# Altium PCB SD171-6.0PCB4.PcbDoc (part 11 of 11)
Units mil, origin at the board's own origin, x right, y up, seen from the top; angles counter-clockwise.
Board outline 5995 x 3921.26 mil, 6 copper layers (Top Layer, GND, Mid-Layer 1, Mid-Layer 2, VCC, Bottom Layer); 477 components, 539 nets, 2143 pads, 1050 vias.
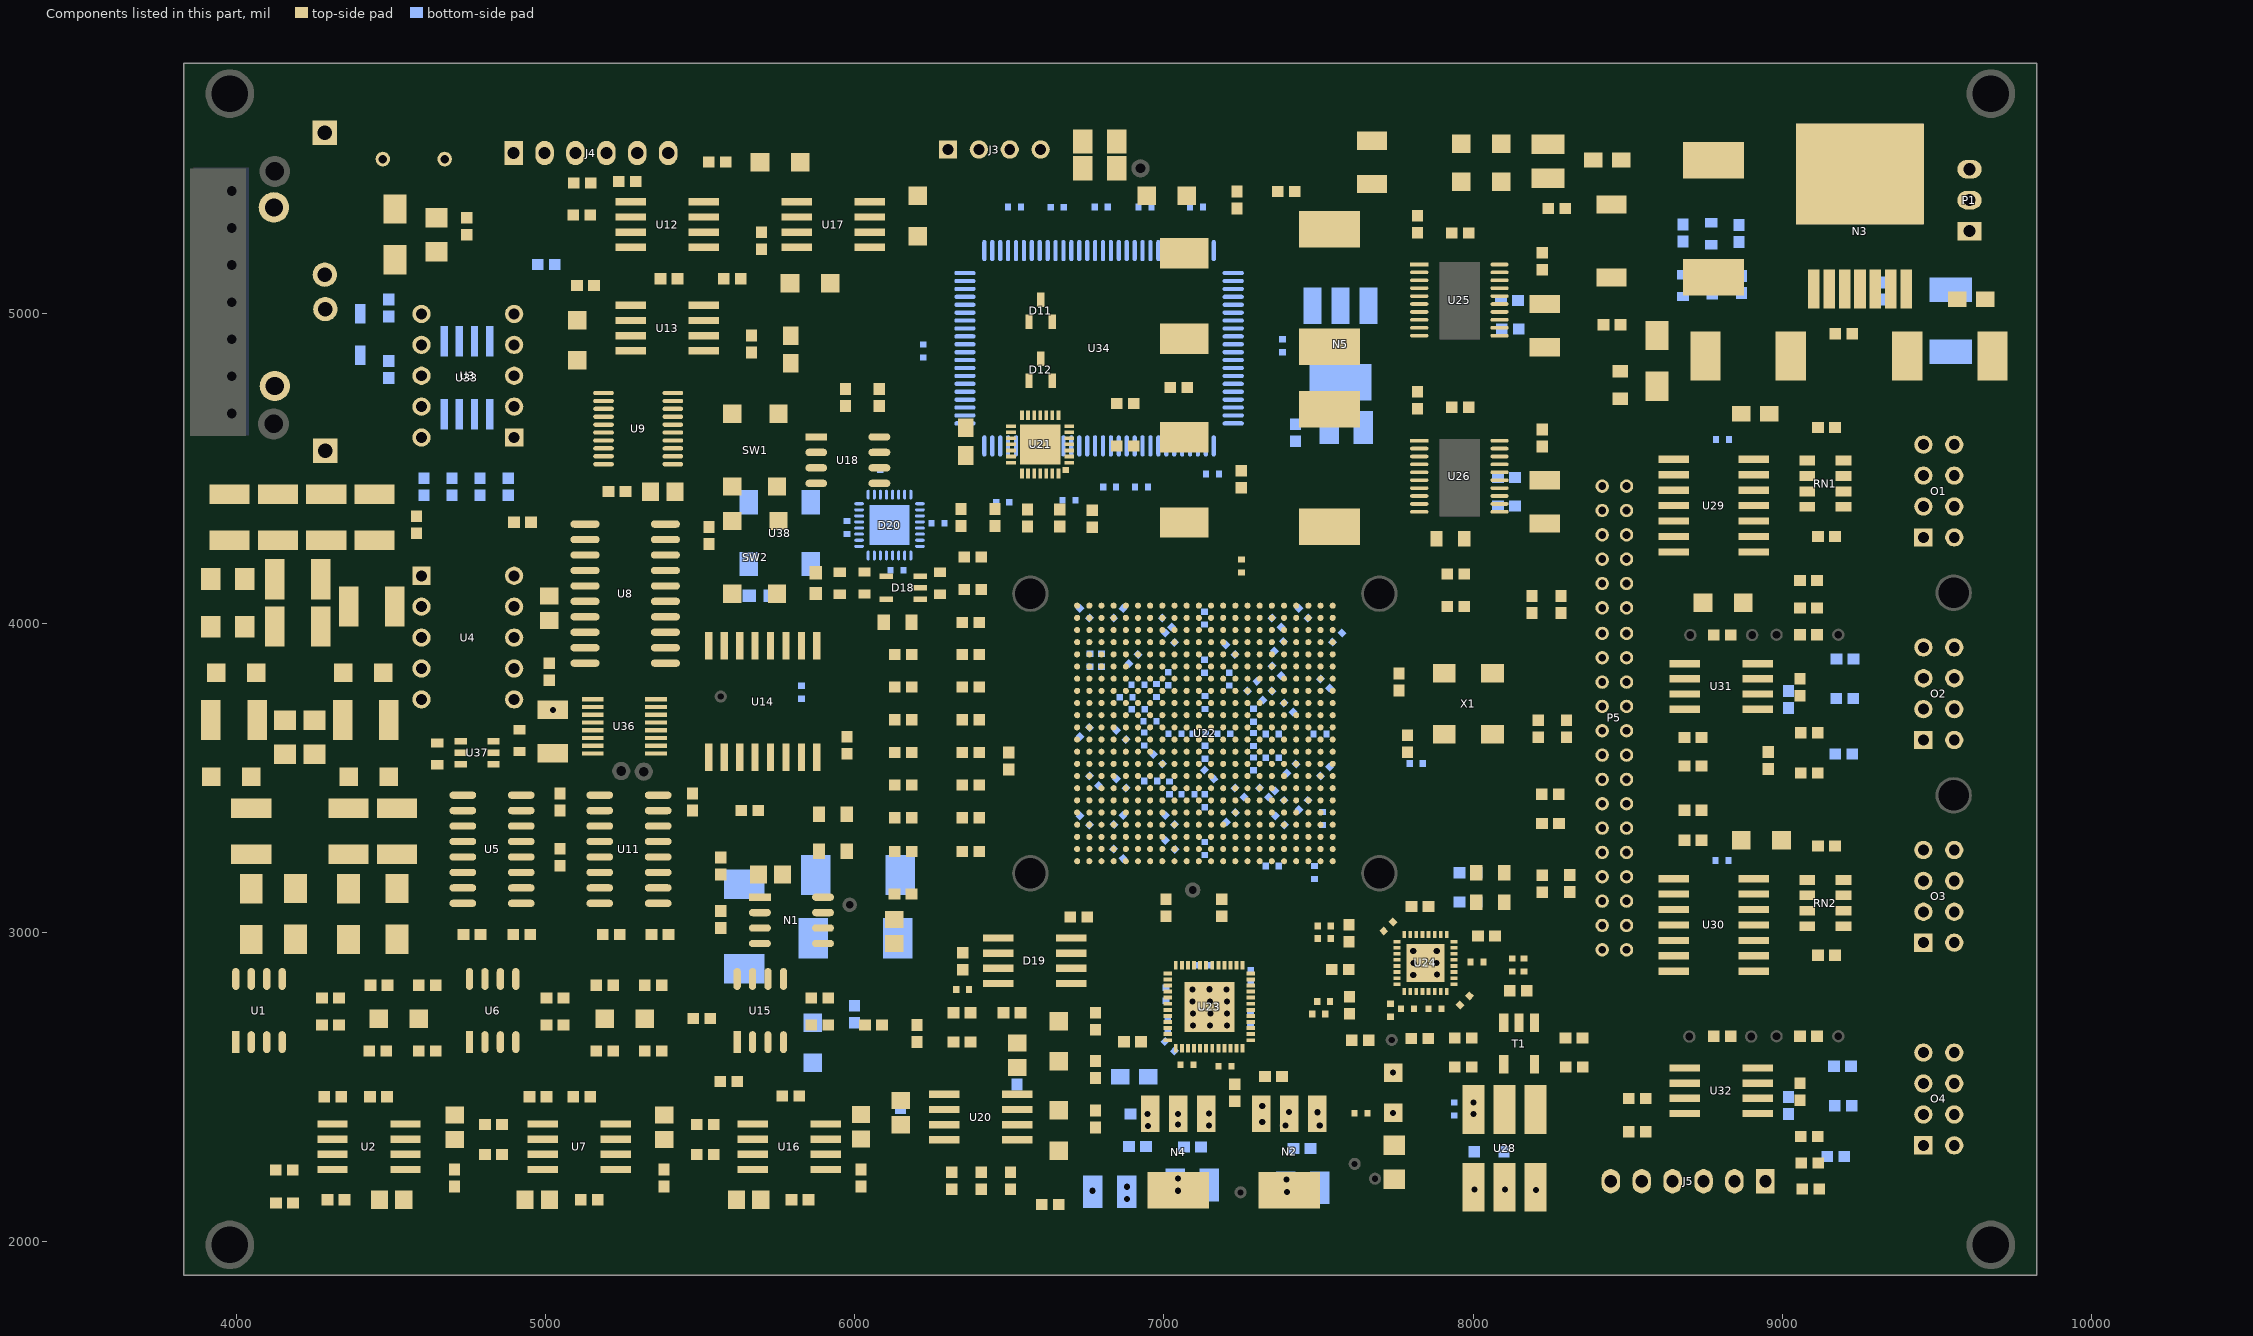
[diagram p15: the components of this part, seen from the top]

## Polygon pours and split planes (outlines as drawn) (continued)
VCC1V2 on VCC (split plane): 7948.44,4686.13 7640.87,4378.56 7417,4378.56 7415.04,4378.31 7413.22,4377.55 7411.65,4376.35 7144.65,4109.35 7143.45,4107.78 7143.14,4107.03 7142.69,4105.96 7142.44,4104 7142.44,3781 7142.69,3779.04 7143.45,3777.22 7144.65,3775.65 7146.22,3774.45 7148.04,3773.69 7150,3773.44 7202,3773.44 7203.96,3773.69 7205.78,3774.45 7207.35,3775.65 7208.55,3777.22 7209.31,3779.04 7209.56,3781 7209.56,3807.87 7223.13,3821.44 7261.44,3821.44 7261.44,3749 7261.69,3747.04 7262.14,3745.97 7262.45,3745.22 7263.65,3743.65 7283.44,3723.87 7283.44,3524.13 7269.87,3510.56 6960.26,3510.56 6957.13,3513.7 6957.13,3543.43 7000.35,3586.65 7001.55,3588.22 7002.31,3590.04 7002.56,3592 7002.56,3773.44 7070.25,3773.44 7072.04,3772.69 7072.27,3772.66 7074,3772.44 7075.73,3772.66 7075.96,3772.69 7077.78,3773.45 7079.35,3774.65 7080.55,3776.22 7081.31,3778.04 7081.34,3778.27 7081.56,3780 7081.56,4018 7081.31,4019.96 7080.86,4021.03 7080.55,4021.78 7079.35,4023.35 6978.56,4124.13 6978.56,4501.87 7059.13,4582.44 7187,4582.44 7461,4582.44 7462.96,4582.69 7464.03,4583.14 7464.78,4583.45 7466.35,4584.65 7694.13,4812.44 7948.44,4812.44
DUTDRVDD on VCC (split plane): 7402.44,2779 7402.69,2777.04 7403.45,2775.22 7404.65,2773.65 7406.22,2772.45 7408.04,2771.69 7410,2771.44 7643.44,2771.44 7643.44,2610 7643.69,2608.04 7644.14,2606.97 7644.44,2606.25 7644.44,2497 7644.69,2495.04 7645.45,2493.22 7646.65,2491.65 7648.22,2490.45 7650.04,2489.69 7652,2489.44 7811.44,2489.44 7811.44,1909.86 7547.56,1909.86 7547.56,2090 7547.31,2091.96 7546.56,2093.75 7546.56,2208 7546.56,2668 7546.31,2669.96 7545.55,2671.78 7544.35,2673.35 7542.78,2674.55 7540.96,2675.31 7539,2675.56 7325.56,2675.56 7325.56,2762 7325.31,2763.96 7324.55,2765.78 7323.35,2767.35 7321.78,2768.55 7319.96,2769.31 7318,2769.56 7228.56,2769.56 7228.56,2833 7228.31,2834.96 7227.55,2836.78 7226.35,2838.35 7224.78,2839.55 7222.96,2840.31 7221,2840.56 7072,2840.56 7070.04,2840.31 7068.22,2839.55 7066.65,2838.35 7065.45,2836.78 7064.69,2834.96 7064.44,2833 7064.44,2765.56 6889.56,2765.56 6889.56,3008.44 7402.44,3008.44
VDD on VCC (split plane): 6800.44,5212 6800.44,4982 6800.69,4980.04 6801.14,4978.97 6801.45,4978.22 6802.65,4976.65 6905.65,4873.65 6907.22,4872.45 6907.97,4872.14 6909.04,4871.69 6911,4871.44 7177.44,4871.44 7177.44,4785.56 6878,4785.56 6876.04,4785.31 6874.22,4784.55 6872.65,4783.35 6832.65,4743.35 6831.45,4741.78 6831.14,4741.03 6830.69,4739.96 6830.44,4738 6830.44,4485.56 6774.56,4485.56 6774.56,4747 6774.31,4748.96 6773.55,4750.78 6772.35,4752.35 6665.35,4859.35 6663.78,4860.55 6663.03,4860.86 6661.96,4861.31 6660,4861.56 6387.56,4861.56 6387.56,4946.44 6677,4946.44 6678.96,4946.69 6680.03,4947.14 6680.78,4947.45 6682.35,4948.65 6717.35,4983.65 6718.55,4985.22 6719.31,4987.04 6719.56,4989 6719.56,5323 6719.31,5324.96 6718.55,5326.78 6717.35,5328.35 6685.56,5360.13 6685.56,5425.44 6800.44,5425.44

## Keep-outs
Keep-Out Layer:
  the board outline again, w3.94

## Other copper
Top Layer:
  rectangle net VCC5V: 8061,4436 8189,4489
  rectangle net VCC5V: 8063,5010 8184,5058
  rectangle net GND: 8014,4345 8109,4415
  rectangle net NetC71_1: 7802,4357 7852,4467
  rectangle net GND: 8012,4917 8110,4984
  rectangle net NetC70_1: 7799,4928 7853,5033
  rectangle net NetC103_1: 8864,5069 9091,5139
VCC (plane layer: these items are gaps in the copper):
  rectangle: 3827,5630.79 4086,5825.79
  rectangle: 3827,1875 4086,2070
  region: 9826,5825 9567,5825 9567,5630 9826,5630
  region: 9826,2070 9567,2070 9567,1875 9826,1875
  lines w11.81: 6426,2761 6600,2761 6603,2758 6603,2611
  lines w15: 6173,2341 6255,2341 6254,2342 6254,2622 6253,2623 6152,2623 5371,2623 4438,2623 4438,3287 5053,3287 5163,3397 5163,3617 5119,3661 4395,3661 4395,5349 5103,5349 5103,5031 5103,4641 ; 6197,2341 4424,2341 ; 6254,2398 6254,2521 ; 6277,2839 6277,2973 6277,3024 6001,3300 5743.7,3300 5707,3263.3 5707,2875 4631.44,2875 4631.44,2898.44 4631.44,3074 5267,3074 5526,3333 5526,3870 5306,4090 4677,4090 ; 6277,2855 6277,2761 6377,2761 ; 6355,2761 6463,2761 ; 6603,2209 7538,2209 7539,2208 ; 6603,2621 6603,2090 4424,2090 ; 6603,2758 6855,2758 7072,2758 7072,2833 7221,2833 7221,2762 7318,2762 7318,2668 7539,2668 7539,2090 ; 6604,2090 4424,2090 ; 6882,2758 6882,3016 7411,3016 7410,3015 7410,2779 7651,2779 7651,2610 7652,2609 7652,2497 7819,2497 7819,1896.76 7826,1889.76 ; 7540,2090 7540,1890.76 7541,1889.76 ; 7790,1892 3828,1892 3828,5813 8005,5813 8005,5378 7737,5378 7615,5500 7416,5500 7299,5617 6228,5617 6028,5417 5849,5238 5849,4942 5645,4738 5645,4336 5408,4336 5103,4641 ; 7819,1890.76 7820,1889.76 ; 9039,2414 9039,2390 ; 9290,2292 9290,2509 9290,2573 9290,4963 9036,4963 8997,5002 8997,5815 8017,5815 8017,5335 8104,5248 8104,4366 8419,4366 8419,4736 9050,4736 9052,4734 9052,3717 8865,3717 8865,3517 9039,3343 9039,2390 ; 9290,2304 9290,2154 9263,2127 9034,2127 9005,2156 9005,2356 9039,2390 ; 4424,2090 4424,2341 ; 4424,2341 4424,2341 ; 4677,4090 4677,4641 ; 4677,4090 4677,4641 ; 4677,4641 5103,4641 ; 6380,4854 6380,4954 ; 6380,4854 6660,4854 ; 6380,4854 6660,4854 ; 6380,4854 6380,4954 ; 6380,4954 6677,4954 ; 6380,4954 6677,4954 ; 6660,4854 6767,4747 ; 6660,4854 6767,4747 ; 6677,4954 6712,4989 ; 6677,4954 6712,4989 ; 6678,5357 6678,5433 ; 6678,5357 6712,5323 ; 6678,5357 6712,5323 ; 6678,5357 6678,5433 ; 6678,5433 6808,5433 ; 6678,5433 6712,5433 6776,5433 6808,5433 ; 6712,4989 6712,5323 ; 6712,4989 6712,5323 ; 6767,4478 6767,4747 ; 6767,4478 6838,4478 ; 6767,4478 6838,4478 ; 6767,4478 6767,4747 ; 6808,5433 6808,5212 7115,5212 7115,5467 7069,5513 6599,5513 6374,5288 6145,5288 6145,4546 6308,4383 6931,4383 6971,4383 6971,4505 ; 6808,5433 6808,4982 6911,4879 7185,4879 7185,4778 ; 6838,4478 6838,4738 ; 6838,4478 6838,4738 ; 6838,4738 6878,4778 ; 6838,4738 6878,4778 ; 6878,4778 7185,4778 ; 6878,4778 7152,4778 7185,4778 ; 6971,4505 7056,4590 ; 6971,4505 6971,4121 7074,4018 7074,3780 7073,3781 6995,3781 6995,3592 6949.56,3546.56 6949.56,3510.56 6957.13,3503 7273,3503 7291,3521 7291,3727 7269,3749 7269,3829 7220,3829 7202,3811 7202,3781 7150,3781 7150,4104 7417,4371 7644,4371 7956,4683 7956,4820 7691,4820 7461,4590 7056,4590 ; 6971,4505 7056,4590 ; 7056,4590 7187,4590 7185,4592 7185,4778
  lines w20: 9012,5005 9012,5075 9012,5815 9800,5815 9800,4736 9303,4736 9303,4973 9301,4975 9047,4975 9042,4975 9012,5005
GND (plane layer: these items are gaps in the copper):
  rectangle: 3829,1905.59 4088,2100.59
  rectangle: 3829,5600.2 4088,5795.2
  region: 9824,5825 9565,5825 9565,5630 9824,5630
  region: 9824,2070 9565,2070 9565,1875 9824,1875
  lines w15: 4951,3740 4951,4212 ; 7221,2761 7221,2832 7071,2832 7071,2760 6284,2760 6284,3265 5716,3265 5654,3327 5221,3327 5221,3048 5484,3048 5485,3047 5485,2889 5367,2889 4982,2889 4982,3051 5022,3091 5022,3293 4849,3293 4849,3503 4850,3502 4593,3502 4592,3503 4592,3689 4949,3689 4951,3691 4951,4212 ; 7222,2762 7318,2762 7318,2668 7539,2668 7539,1891.76 7541,1889.76 ; 8084,1894 3827,1894 3827,5813 7833,5813 7833,5380 7457,5380 7411,5426 6793,5426 6793,5591 6757,5591 6173,5591 6172,5592 6172,5218 6013,5059 6013,4714 5737,4714 5669,4782 5247,4782 5111,4646 4875,4646 4681,4840 4523,4840 4523,4356 4667,4212 4951,4212

## Silkscreen, mask and mechanical layers (free items; w line width, h text height)
Top Overlay:
  circle w10: c7091.9,3135 r35
  text "SD171-7.0PCB5" at 4445,5621 h50
  text "AGND" at 6907,5601 h31.5
  text "U5V" at 6249,5600 h31.5
  text "UD+" at 6469,5599 h31.5
  text "UD-" at 6367,5598 h31.5
  text "VCC5V" at 8641,5594 h31.5
  text "+" at 8299,5532 h31.5
  text "A5V" at 7838,5489 h31.5 r90
  text "3.3V" at 7482,5351 h31.5
  text "+" at 9473,5277 h31.5
  text "1" at 7809,5175 h31.5
  text "1.2V" at 7472,4762 h31.5
  text "1" at 7810,4607 h31.5
  text "." at 6727,4514 h31.5
  text "1" at 6741,4503 h31.5
  text "39" at 8393,4470 h31.5
  text "+" at 4008,4032 h31.5
  text "+" at 4139,3723 h31.5
  text "+" at 4234,3723 h31.5
  text "1" at 5201,3612 h31.5 r90
  text "2.5V" at 5399,3521 h31.5
  text "DCO" at 7057,3057 h31.5
  text "1" at 5423,3056 h31.5 r90
  text "1" at 4985,3055 h31.5 r90
  text "1" at 8416,2876 h31.5
  text "1.8V" at 7354,2056 h31.5
  text "A3.3V" at 6975,2050 h31.5
Bottom Overlay:
  text "PV" at 4156,5225 h31.5
  text "PD" at 4151,4648 h31.5
  text "TX" at 9671,4382 h31.5 r90
  text "RX" at 9676,3722 h31.5 r90
  text "TX" at 9677,3065 h31.5 r90
  text "RX" at 9683,2414 h31.5 r90
  text "A5V" at 6925,2056 h31.5
  text "R124 To R131 Fited For HFBR-2412" at 9509,2011 h31.5

## Dimensions
9824,1889.76 to 9807,2210 on Mechanical 1
10694,2210 to 9807,2710 on Mechanical 1
9807,2865.67 to 10694,2710 on Mechanical 1
9807,2865.67 to 9807,3365.67 on Mechanical 1
9807,3365.67 to 9807,3521.33 on Mechanical 1
9807,3521.33 to 9807,4021.33 on Mechanical 1
9807,4177 to 9807,4021.33 on Mechanical 1
9807,4177 to 9807,4677 on Mechanical 1
9824,5811.02 to 9824,1889.76 on Mechanical 1
9824,5811.02 to 3829,5811.02 on Mechanical 1